# Altium PCB ST25DV.PcbDoc
Units mil, origin at the board's own origin, x right, y up, seen from the top; angles counter-clockwise.
Board outline 6000 x 4000 mil, 2 copper layers (Top Layer, Bottom Layer); 12 components, 10 nets, 40 pads, 0 vias.
Unrouted connection lines stored in the file: 25.
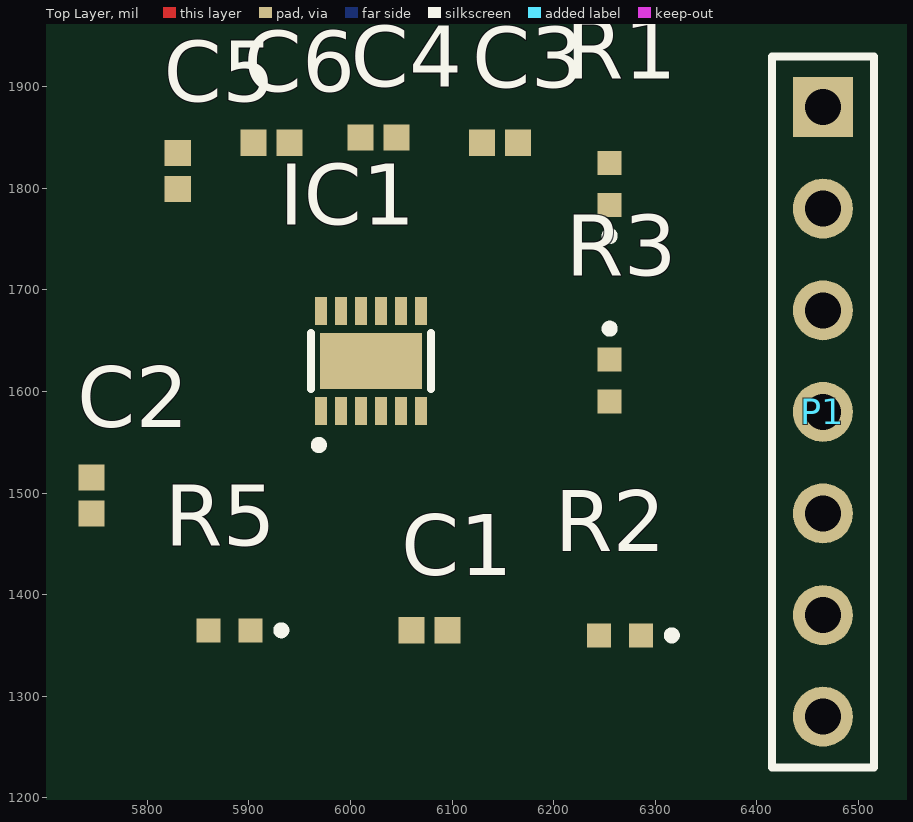
[diagram p0: Top Layer view]
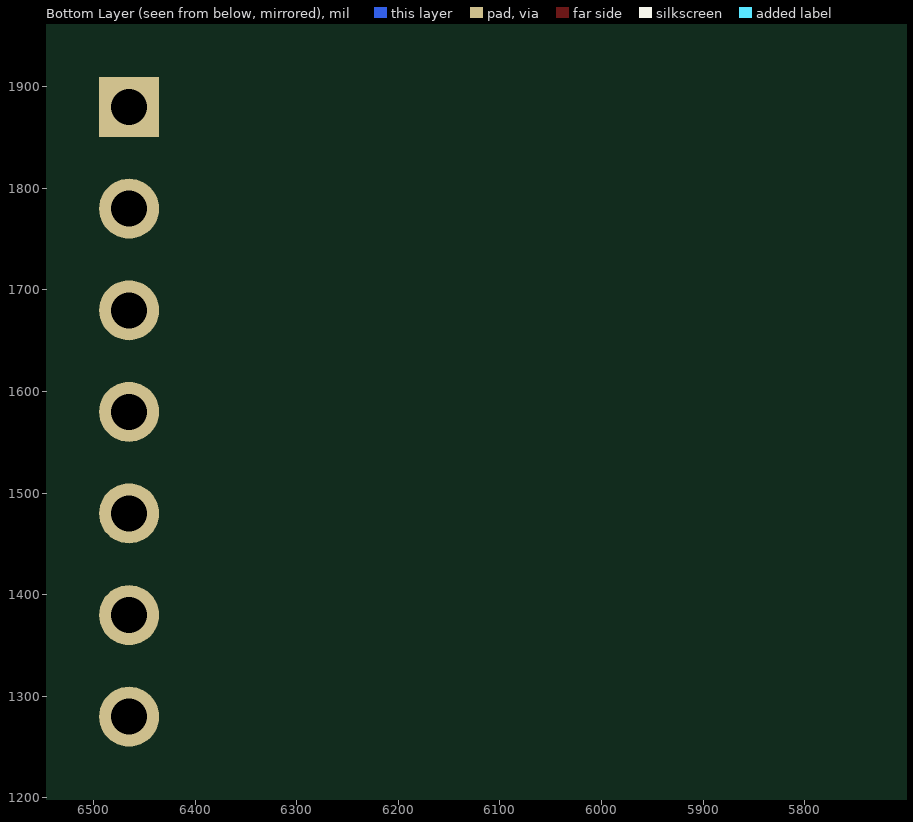
[diagram p1: Bottom Layer view, seen from below]

## Layer stack, top to bottom
Top Solder: solder mask 0.4, Solder Resist, Dk 3.5
Top Layer: signal copper 1.4
Dielectric 1: dielectric 12.6, FR-4, Dk 4.8
Bottom Layer: signal copper 1.4
Bottom Solder: solder mask 0.4, Solder Resist, Dk 3.5

## Board outline
1000,1000 7000,1000 7000,5000 1000,5000

## Design rules (kind name [scope] priority, off if disabled: settings)
Clearance [All] p1: gap=10 ignorepadtopadclearanceinfootprint=FALSE
PolygonConnect [All] p1: connectstyle=Relief reliefconductorwidth=10 reliefentries=4 polygonreliefangle="90 Angle" airgapwidth=10
RoutingVias [All] p1: holewidth=28 width=50 viastyle="Through Hole" minholewidth=28 minwidth=50 maxholewidth=28 maxwidth=50
SolderMaskExpansion [All] p1: expansion=4 istentingtop=FALSE
SupplyNets "Schematic Supply Nets_4" [InNet('EH')] p1: voltage=0.000
SupplyNets "Schematic Supply Nets_3" [InNet('VCC')] p2: voltage=0.000
SupplyNets "Schematic Supply Nets_2" [InNet('V_EH')] p3: voltage=0.000
SupplyNets "Schematic Supply Nets_1" [InNet('3V3')] p4: voltage=0.000
SupplyNets "Schematic Supply Nets" [InNet('GND')] p5: voltage=0.000
Width [All] p1: maxlimit=10 minlimit=10 preferedwidth=10
30 further rules are at their usual default settings.

## Components (designator, comment, footprint, x,y, rotation, side; value= is the part's Value field where it differs from the comment)
C1 "10nF" CAPC1005X60N 6077.72,1365 r0 top
C2 "10nF" CAPC1005X60N 5745,1497.72 r90 top
C3 "NC" CAPC1005X60N 6147.28,1845 r0 top
C4 "NC" CAPC1005X60N 6027.72,1850 r180 top
C5 "NC" CAPC1005X60N 5830,1817.28 r90 top
C6 "NC" CAPC1005X60N 5922.28,1845 r180 top
IC1 "ST25DV16KC-JF6D3" ST25DV64KCJF6D3 6020,1630 r0 top
P1 "Header 7" HDR1X7 6465,1880 r270 top
R1 "20K" CRCW0402200KFKED 6255,1804.33 r90 top
R2 "1K" CRCW0402200KFKED 6265,1360 r180 top
R3 "1K" CRCW0402200KFKED 6255,1610.67 r270 top
R5 "0R" CRCW0402200KFKED 5880.67,1365 r180 top

## Footprints (in the part's own frame and the unit in brackets; to place one, negate y for a bottom-side part, rotate by r counter-clockwise, add the part's x,y. Pads: shape width x height; smd on the part's side, far side on the other; paste and mask are expansions set on the pad)
CAPC1005X60N [mm]
  rect 0.65x0.66 smd: 1(-0.45,0) 2(0.45,0)
  body extent -0.5,0 0.5,0.6, height 0.25
CRCW0402200KFKED [mm]
  rect 0.6x0.6 smd: 1(-0.525,0) 2(0.525,0)
  silkscreen extent -1.4,-0.1 -1.2,0.1, body extent -0.5,-0.25 0.5,0.25, height 0.35
HDR1X7 [mm] "Connector; Header; 7 Position"
  rect 1.5x1.5 hole 0.9: 1(0,0)
  round 1.5 hole 0.9: 2(2.54,0) 3(5.08,0) 4(7.62,0) 5(10.16,0) 6(12.7,0) 7(15.24,0)
  silkscreen extent -1.27,-1.27 16.51,1.27
ST25DV64KCJF6D3 [mm]
  rect 0.3x0.7 smd: 1(-1.25,-1.25) 2(-0.75,-1.25) 3(-0.25,-1.25) 4(0.25,-1.25) 5(0.75,-1.25) 6(1.25,-1.25) 7(1.25,1.25) 8(0.75,1.25) 9(0.25,1.25) 10(-0.25,1.25) 11(-0.75,1.25) 12(-1.25,1.25)
  rect 2.55x1.4 smd: 13(0,0)
  silkscreen extent -1.5,-2.2 1.5,0.7, body extent -1.5,-1.5 1.5,1.5, height 0.55

## Part data
C1 C2 C3 C4 C5 C6: library part VJ0402Y103KXAAC, "Capacitor", Manufacturer_Name=Vishay, Mouser Part Number=77-VJ0402Y103KXAAC, Datasheet Link=https://www.vishay.com/docs/45199/vjcommercialseries.pdf, Height=0.6mm, Manufacturer_Part_Number=VJ0402Y103KXAAC, Mouser Price/Stock=https://www.mouser.co.uk/ProductDetail/Vishay-Vitramon/VJ0402Y103KXAAC?qs=e%2F7vlcXyL81c3K8Dz3L1zQ%3D%3D
IC1: "Integrated Circuit", Manufacturer_Name=STMicroelectronics, Mouser Part Number=511-ST25DV16KC-JF6D3, Datasheet Link=https://www.st.com/resource/en/datasheet/st25dv04kc.pdf, Height=0.6mm, Manufacturer_Part_Number=ST25DV16KC-JF6D3, Mouser Price/Stock=https://www.mouser.co.uk/ProductDetail/STMicroelectronics/ST25DV16KC-JF6D3?qs=QNEnbhJQKvagGd4c%252BMJmeA%3D%3D
P1: "Header, 7-Pin", LatestRevisionDate=17-Jul-2002, LatestRevisionNote="Re-released for DXP Platform.", Publisher="Altium Limited"
R1 R2 R3 R5: library part CRCW04021K65FKEE, "Resistor", Manufacturer_Name=Vishay, Datasheet Link=http://www.vishay.com/docs/20035/dcrcwe3.pdf, Height=0.4mm, Manufacturer_Part_Number=CRCW04021K65FKEE

## Nets (pads, with @x,y where several pads share a name; then routed paths per layer and width w, separated by ;. In a path a pad name is that pad's centre, name@x,y a point inside that pad or via, vN(x,y) a via of type N, cw(c..) or ccw(c..) an arc to the next point about the centre after c; other vN are vias at no path point)
3V3: P1.6
AC0: IC1.4
AC1: C3.2 C4.1 C4.2 C6.1 IC1.5
EH: C5.1 P1.7 R5.2
GND: C1.1 C2.2 C3.1 C5.2 C6.2 IC1.6 P1.4
GPO: IC1.11 P1.1 R1.2
SCL: IC1.8 P1.2 R2.2
SDA: IC1.7 P1.3 R3.2
V_EH: C2.1 IC1.3 R5.1
VCC: C1.2 IC1.12 P1.5 R1.1 R2.1 R3.1
pads on no net: IC1.1 IC1.2 IC1.9 IC1.10 IC1.13